# Altium PCB NEW_PCB_2022-06-09.pcbdoc
Units mm, origin at the board's own origin, x right, y up, seen from the top; angles counter-clockwise.
Board outline 32.5 x 29.83 mm, 2 copper layers (Top Layer, Bottom Layer); 1 components, 0 nets, 4 pads, 0 vias.
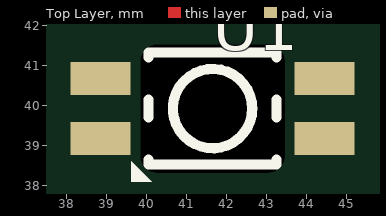
[diagram p0: Top Layer view]
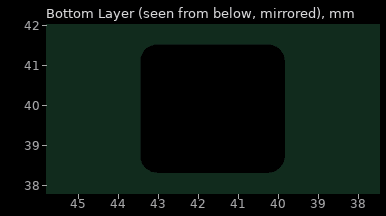
[diagram p1: Bottom Layer view, seen from below]

## Layer stack, top to bottom
Top Layer: signal copper (thickness not stored)
Dielectric: dielectric 0.32, FR-4, Dk 4.8
Bottom Layer: signal copper (thickness not stored)

## Board outline
57.9,25.4 25.4,25.4 25.4,55.233 57.9,55.233

## Components (designator, comment, footprint, x,y, rotation, side; value= is the part's Value field where it differs from the comment)
U1 "LED-SMD_L3.2-W2.8-BR_DY-S352818" LED-SMD_L3.2-W2.8-BR_DY-S352818 41.65,39.93 r0 top

## Footprints (in the part's own frame and the unit in brackets; to place one, negate y for a bottom-side part, rotate by r counter-clockwise, add the part's x,y. Pads: shape width x height; smd on the part's side, far side on the other; paste and mask are expansions set on the pad)
LED-SMD_L3.2-W2.8-BR_DY-S352818 [mm]
  rect 1.5x0.82 smd: 1(2.8,-0.75) 2(2.8,0.75) 3(-2.8,0.75) 4(-2.8,-0.75)
  Multi-Layer board cut-out: 1.8,-1.2 1.746,-1.4 1.6,-1.547 1.4,-1.6 1.4,-1.6 1.4,-1.6 1.4,-1.6 -1.4,-1.6 -1.403,-1.6 -1.406,-1.6 -1.406,-1.6 -1.406,-1.6 -1.604,-1.545 -1.747,-1.398 -1.8,-1.2 -1.8,-1.2 -1.8,-1.2 -1.8,-1.2 -1.8,-1.2 -1.8,-1.2 -1.8,-1.2 -1.8,-1.2 -1.8,1.2 -1.8,1.2 -1.746,1.4 -1.6,1.546 -1.4,1.6 -1.4,1.6 -1.4,1.6 1.4,1.6 1.4,1.6 1.4,1.6 1.6,1.547 1.746,1.4 1.8,1.2 1.8,1.2 1.8,1.2 1.8,-1.2 1.8,-1.2
  Multi-Layer board cut-out: -1.4,-1.6 -1.413,-1.6 -1.413,-1.6 -1.409,-1.6 -1.406,-1.6 -1.406,-1.6 -1.406,-1.6 -1.406,-1.6 -1.406,-1.6 -1.403,-1.6 -1.4,-1.6 -1.4,-1.6 -1.4,-1.6
  silkscreen extent -2.03,-1.83 1.6,1.4

## Nets (pads, with @x,y where several pads share a name; then routed paths per layer and width w, separated by ;. In a path a pad name is that pad's centre, name@x,y a point inside that pad or via, vN(x,y) a via of type N, cw(c..) or ccw(c..) an arc to the next point about the centre after c; other vN are vias at no path point)
pads on no net: U1.1 U1.2 U1.3 U1.4